# Altium PCB Electrode_Array_Hex_PCB.PcbDoc
Units mm, origin at the board's own origin, x right, y up, seen from the top; angles counter-clockwise.
Board outline 39.88 x 41.27 mm, 2 copper layers (Top Layer, Bottom Layer); 2 components, 43 nets, 90 pads, 62 vias.
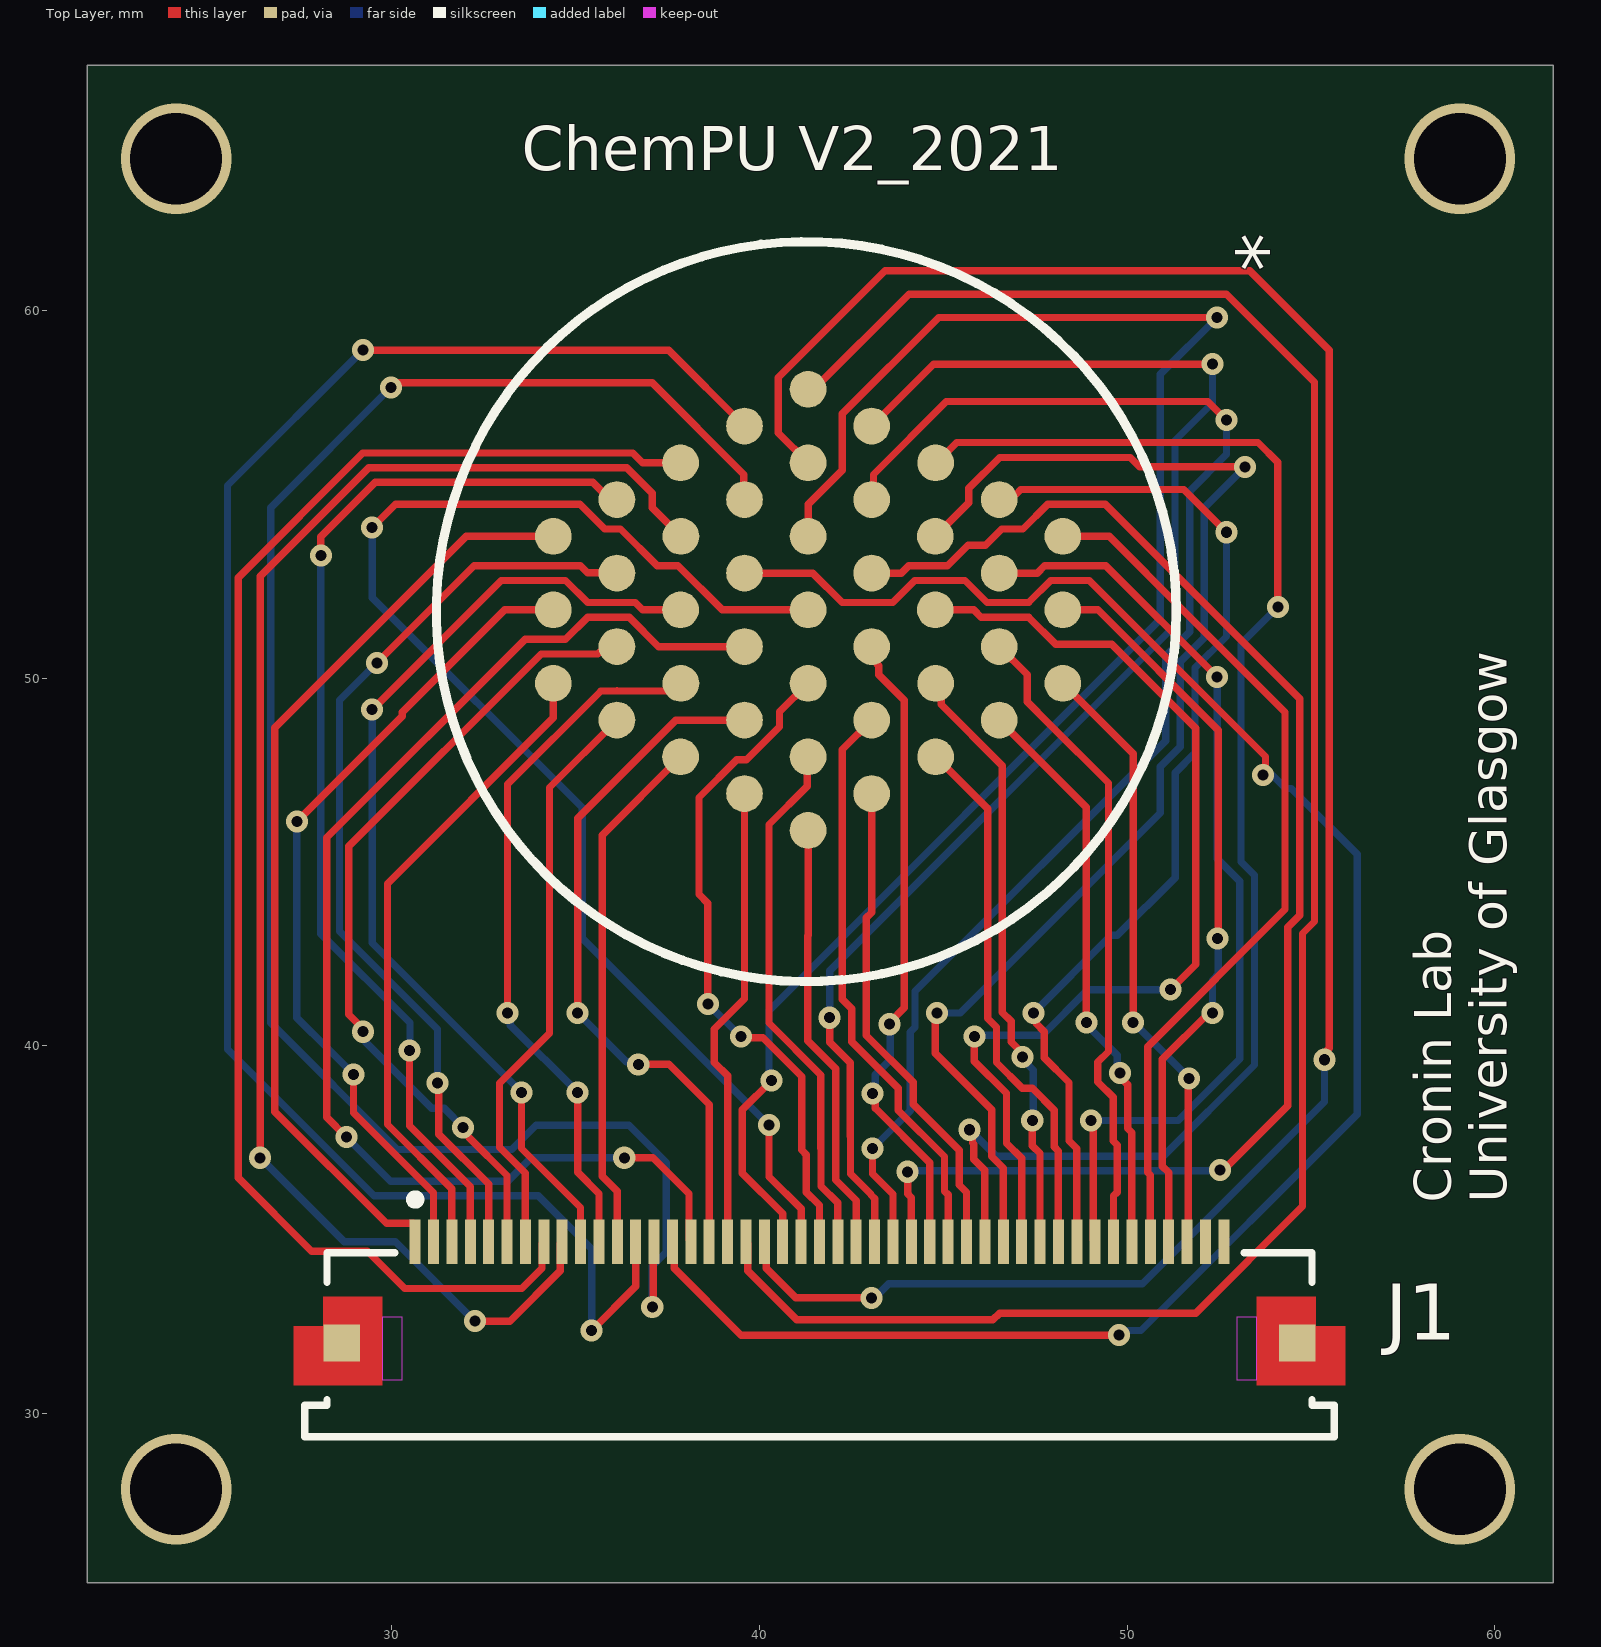
[diagram p0: Top Layer view]
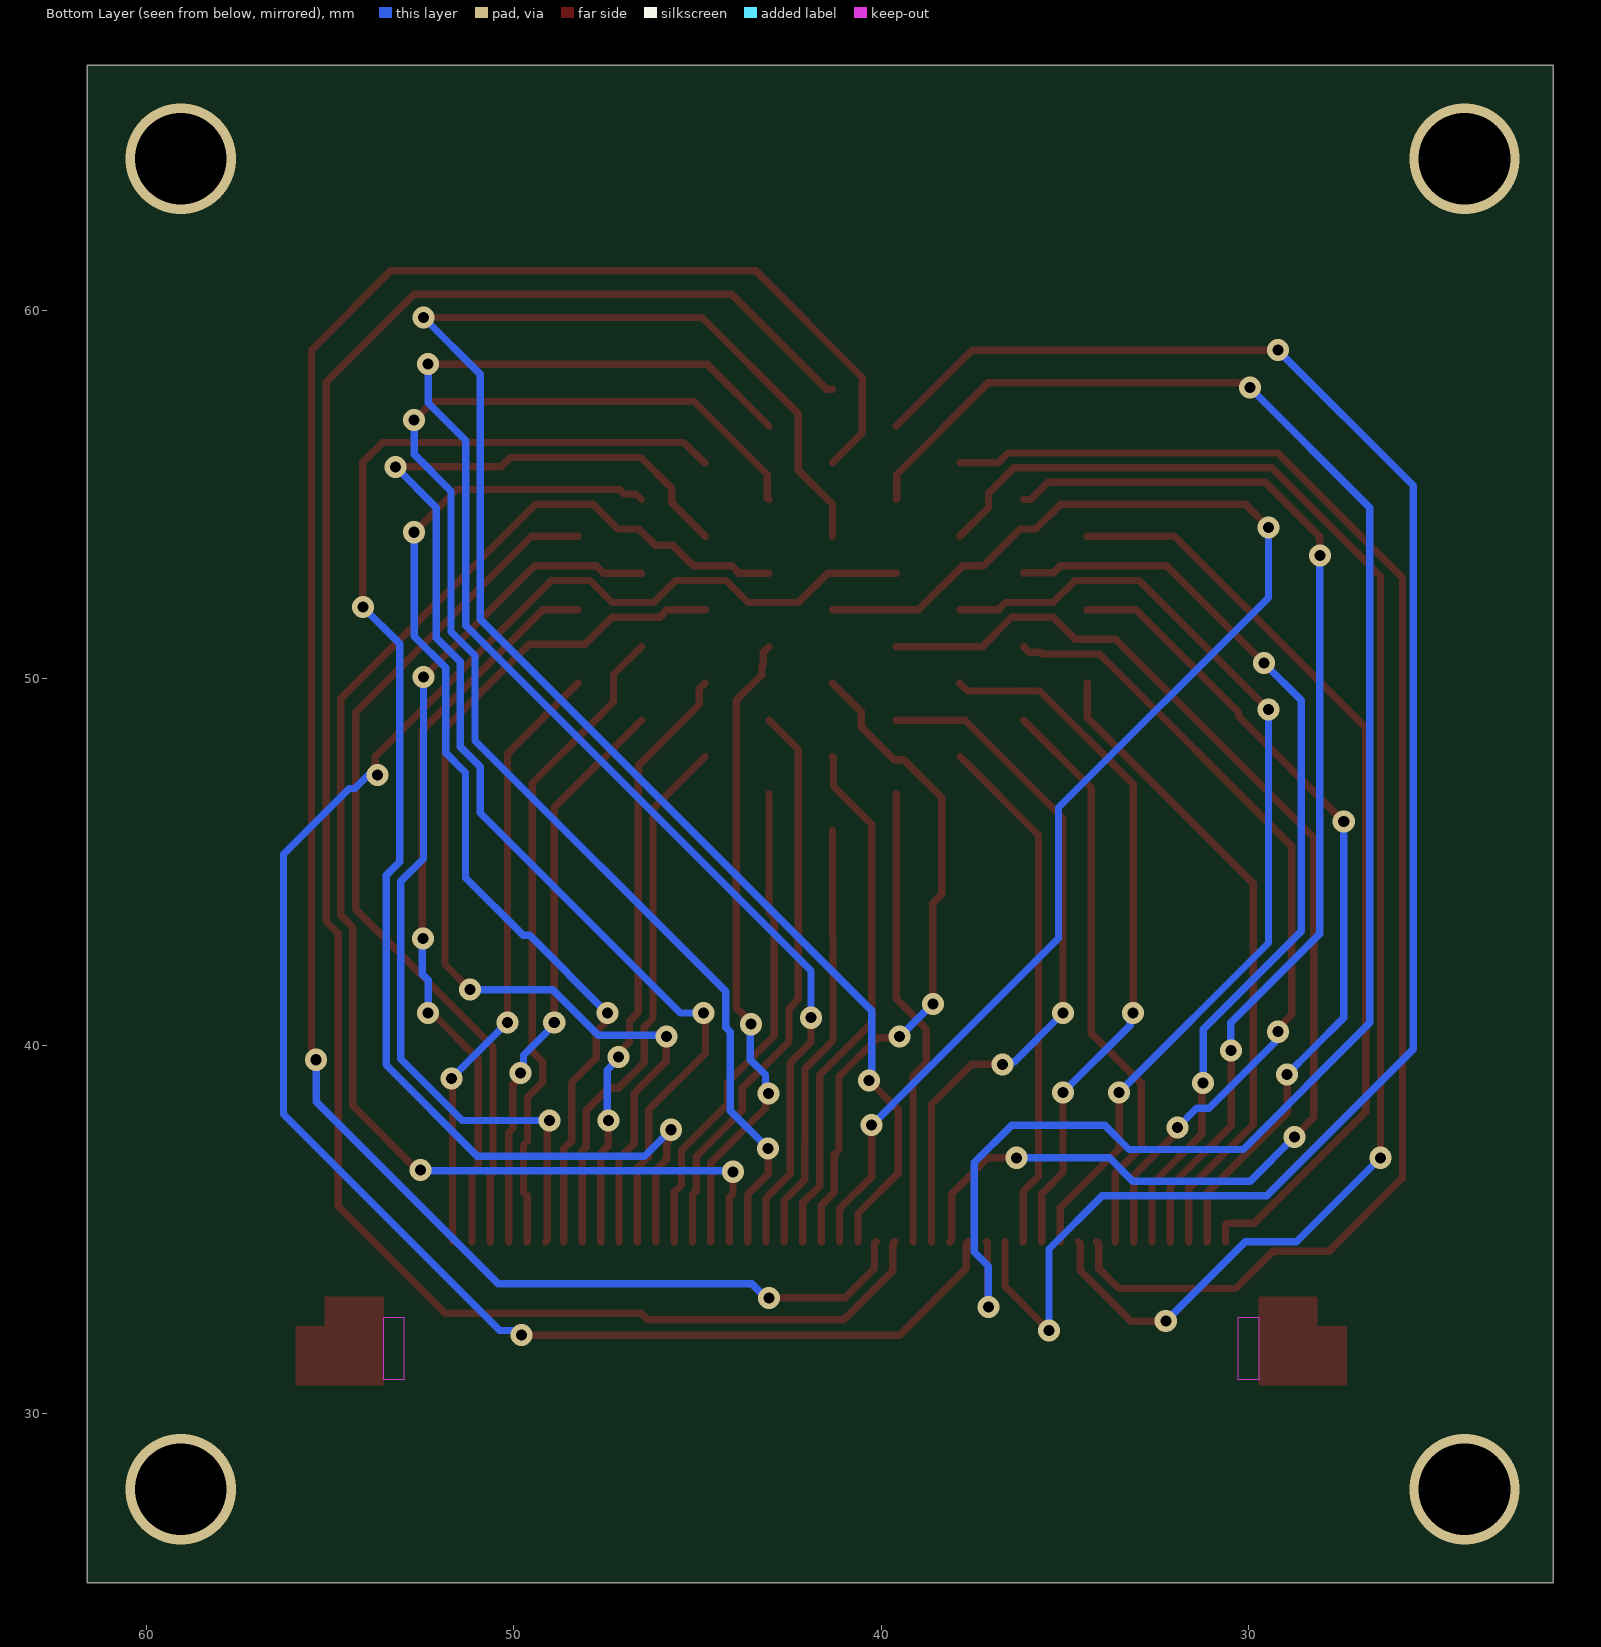
[diagram p1: Bottom Layer view, seen from below]

## Layer stack, top to bottom
Top Solder: solder mask 0.0102, Solder Resist, Dk 3.5
Top Layer: signal copper 0.0356
Dielectric 1: dielectric 0.32, FR-4, Dk 4.8
Bottom Layer: signal copper 0.0356
Bottom Solder: solder mask 0.0102, Solder Resist, Dk 3.5

## Board outline
21.717,25.4 61.595,25.4 61.595,66.675 21.717,66.675

## Design rules (kind name [scope] priority, off if disabled: settings)
Clearance [All] p1: gap=0.2 ignorepadtopadclearanceinfootprint=FALSE
PolygonConnect [All] p1: connectstyle=Relief reliefconductorwidth=0.254 reliefentries=4 polygonreliefangle="90 Angle" airgapwidth=0.254
RoutingVias [All] p1: holewidth=0.3 width=0.6 viastyle="Through Hole" minholewidth=0.3 minwidth=0.6 maxholewidth=0.3 maxwidth=0.6
SolderMaskExpansion [All] p1: expansion=0.102 istentingtop=FALSE
Width [All] p1: maxlimit=0.2 minlimit=0.15 preferedwidth=0.2
30 further rules are at their usual default settings.

## Components (designator, comment, footprint, x,y, rotation, side; value= is the part's Value field where it differs from the comment)
* "Electrode_Array_Hex" PCBComponent_1 1300.813,-1207.626 r270 top
J1 "54132-4562" MOLX-54132-4562 41.633,33.296 r0 top

## Footprints (in the part's own frame and the unit in brackets; to place one, negate y for a bottom-side part, rotate by r counter-clockwise, add the part's x,y. Pads: shape width x height; smd on the part's side, far side on the other; paste and mask are expansions set on the pad)
MOLX-54132-4562 [mm] "FPC Connector, 45-Leads, Right Angle, Pitch 0.5 mm, Mated Height 2.0 mm, SMT"
  rect 0.3x1.2 smd: 1(-11,1.375) 2(-10.5,1.375) 3(-10,1.375) 4(-9.5,1.375) 5(-9,1.375) 6(-8.5,1.375) 7(-8,1.375) 8(-7.5,1.375) 9(-7,1.375) 10(-6.5,1.375) 11(-6,1.375) 12(-5.5,1.375) 13(-5,1.375) 14(-4.5,1.375) 15(-4,1.375) 16(-3.5,1.375) 17(-3,1.375) 18(-2.5,1.375) 19(-2,1.375) 20(-1.5,1.375) 21(-1,1.375) 22(-0.5,1.375) 23(0,1.375) 24(0.5,1.375) 25(1,1.375) 26(1.5,1.375) 27(2,1.375) 28(2.5,1.375) 29(3,1.375) 30(3.5,1.375) 31(4,1.375) 32(4.5,1.375) 33(5,1.375) 34(5.5,1.375) 35(6,1.375) 36(6.5,1.375) 37(7,1.375) 38(7.5,1.375) 39(8,1.375) 40(8.5,1.375) 41(9,1.375) 42(9.5,1.375) 43(10,1.375) 44(10.5,1.375) 45(11,1.375)
  rect 1x1 smd: MP1(-13,-1.375) MP2(13,-1.375)
  Top Layer region: 11.9,-0.125 13.5,-0.125 13.5,-0.925 14.3,-0.925 14.3,-2.525 11.9,-2.525
  Top Layer region: -11.9,-0.125 -13.5,-0.125 -13.5,-0.925 -14.3,-0.925 -14.3,-2.525 -11.9,-2.525
  Keep-Out Layer region: 11.9,-0.675 11.35,-0.675 11.35,-2.375 11.9,-2.375
  Keep-Out Layer region: -11.9,-2.375 -11.35,-2.375 -11.35,-0.675 -11.9,-0.675
  silkscreen extent -14,-3.92 14,2.65, body extent -14,-3.92 14,1.68, height 2.01
PCBComponent_1 [mm]
  round 1 smd paste+0 mask+0: WE1(-1261.49,-1266.42) WE2(-1259.49,-1266.42) WE3(-1257.49,-1266.42) WE4(-1262.49,-1264.69) WE5(-1260.49,-1264.69) WE6(-1258.49,-1264.69) WE7(-1256.49,-1264.69) WE8(-1263.49,-1262.96) WE9(-1261.49,-1262.95) WE10(-1259.49,-1262.96) WE11(-1257.49,-1262.95) WE12(-1255.49,-1262.96) WE13(-1264.49,-1261.22) WE14(-1262.49,-1261.22) WE15(-1260.49,-1261.22) WE16(-1258.49,-1261.22) WE17(-1256.49,-1261.22) WE18(-1254.49,-1261.22) WE19(-1265.49,-1259.49) WE20(-1263.49,-1259.49) WE21(-1261.49,-1259.49) WE22(-1259.49,-1259.49) WE23(-1257.49,-1259.49) WE24(-1255.49,-1259.49) WE25(-1253.49,-1259.49) WE26(-1264.49,-1257.76) WE27(-1262.49,-1257.76) WE28(-1260.49,-1257.76) WE29(-1258.49,-1257.76) WE30(-1256.49,-1257.76) WE31(-1254.49,-1257.76) WE32(-1263.49,-1256.02) WE33(-1261.49,-1256.03) WE34(-1259.49,-1256.03) WE35(-1257.49,-1256.02) WE36(-1255.49,-1256.02) WE37(-1262.49,-1254.29) WE38(-1260.49,-1254.29) WE39(-1258.49,-1254.29) WE40(-1256.49,-1254.29) WE41(-1261.49,-1252.56) WE42(-1259.49,-1252.56) WE43(-1257.49,-1252.56)

## Part data
J1: library part CMP-1241-00535-1, "0.5 mm Pitch Easy-On(TM) Type FPC Connector, 2.0 mm Mated Height, Right Angle, ZIF, SMT, Bottom Contact, 45 Circuits, -20 to 85 degC, ELV and RoHS Compliant, Tape and Reel", Current (Max per Contact)=0.5A, Manufacturer=Molex, Voltage (Max)=50V, Circuits (Loaded)=45, ComponentLink1Description="Manufacturer URL", ComponentLink1URL=http://www.molex.com/molex/index.jsp, ComponentLink2Description=Datasheet, ComponentLink2URL=http://www.molex.com/webdocs/datasheets/pdf/en-us/0541324562_FFC_FPC_CONNECTORS.pdf, ComponentLink3Description="Package Specification", ComponentLink3URL=http://www.molex.com/pdm_docs/sd/541324562_sd.pdf, Contact Position=Bottom, Durability (mating cycles max)=20, Entry Angle="90degrees Angle", Mated Height=2.00mm, Material - Metal="Phosphor Bronze", Material - Plating Mating=Gold, Material - Plating Termination=Gold, Mounting Technology="Surface Mount", Number of Rows=1, Orientation="Right Angle", PackageDescription="45-Lead FPC Connector, Pitch 0.5 mm", PackageReference=54132-4562, PackageVersion="Rev. F, 07/2010", Packing="Tape and Reel", PartNumber=54132-4562, PCB Locator=No, PCB Retention=Yes, Pitch - Mating Interface=0.50mm, Polarized to PCB=Yes, RoHS=TRUE, Stackable=No

## Via types
v1: diameter 0.6, hole 0.3, Top Layer to Bottom Layer, 58 vias
v2: diameter 3, hole 2.5, Top Layer to Bottom Layer, 4 vias

## Nets (pads, with @x,y where several pads share a name; then routed paths per layer and width w, separated by ;. In a path a pad name is that pad's centre, name@x,y a point inside that pad or via, vN(x,y) a via of type N, cw(c..) or ccw(c..) an arc to the next point about the centre after c; other vN are vias at no path point)
WE1: *.WE1 J1.1 | length 25.7
  Top Layer w0.2: J1.1 30.633,35.121 30.583,35.171 29.853,35.171 26.816,38.208 26.816,48.66 32.02,53.864 *.WE1
WE2: *.WE2 J1.2 | length 22.4
  Top Layer w0.2: v1(27.416,46.101) 30.28,48.965 30.28,49.076 33.068,51.864 *.WE2 ; v1(28.956,39.227) 28.956,38.178 31.133,36.001 J1.2
  Bottom Layer w0.2: v1(27.416,46.101) 27.416,40.767 28.292,39.891 v1(28.956,39.227)
WE3: *.WE3 J1.3 | length 17.8
  Top Layer w0.2: J1.3 31.633,36.11 29.88,37.863 29.88,44.416 34.393,48.929 *.WE3
WE4: *.WE4 J1.4 | length 29.7
  Top Layer w0.2: v1(28.067,53.34) 28.067,53.848 29.552,55.333 35.46,55.333 35.929,54.864 *.WE4 ; v1(30.48,39.878) 30.48,37.829 32.133,36.176 J1.4
  Bottom Layer w0.2: v1(28.067,53.34) 28.067,43.053 30.493,40.627 30.493,39.891 v1(30.48,39.878)
WE5: *.WE5 J1.5 | length 25.6
  Top Layer w0.2: v1(29.591,50.419) 32.236,53.064 34.558,53.064 35.132,53.064 35.323,52.873 36.114,52.873 *.WE5 ; v1(31.242,38.989) 31.277,38.954 31.277,37.597 32.633,36.241 J1.5
  Bottom Layer w0.2: v1(29.591,50.419) 28.575,49.403 28.575,43.122 31.242,40.455 v1(31.242,38.989)
WE6: *.WE6 J1.6 | length 22.3
  Top Layer w0.2: v1(29.21,40.386) 29.21,40.473 28.829,40.854 28.829,45.431 34.062,50.664 34.724,50.664 35.606,50.664 35.653,50.711 35.97,50.711 *.WE6 ; v1(31.941,37.782) 31.941,37.674 32.107,37.508 32.107,37.501 33.133,36.475 J1.6
  Bottom Layer w0.2: v1(29.21,40.386) 29.287,40.309 29.287,40.096 31.083,38.3 31.423,38.3 v1(31.941,37.782)
WE7: *.WE7 J1.7 | length 15.8
  Top Layer w0.2: J1.7 33.633,36.54 32.928,37.245 32.928,38.984 34.111,40.167 34.29,40.346 34.29,47.031 *.WE7
WE8: *.WE8 J1.8 | length 40.4
  Top Layer w0.2: J1.8 34.083,34.621 34.083,33.947 33.537,33.401 30.353,33.401 29.337,34.417 27.813,34.417 25.816,36.414 25.816,52.74 29.209,56.133 36.551,56.133 36.82,55.864 *.WE8
WE9: *.WE9 J1.9 | length 40.9
  Top Layer w0.2: v1(26.416,36.957) 26.416,52.774 29.374,55.733 36.386,55.733 37.082,55.036 37.082,54.645 *.WE9 ; v1(32.258,32.512) 33.214,32.512 34.583,33.881 34.583,34.621 J1.9
  Bottom Layer w0.2: v1(26.416,36.957) 28.702,34.671 30.099,34.671 v1(32.258,32.512)
WE10: *.WE10 J1.10 | length 27
  Top Layer w0.2: v1(29.464,49.149) 32.979,52.664 34.724,52.664 35.324,52.064 36.62,52.064 36.82,51.864 *.WE10 ; v1(33.528,38.735) 33.528,37.211 35.133,35.606 J1.10
  Bottom Layer w0.2: v1(29.464,49.149) 29.464,42.799 v1(33.528,38.735)
WE11: *.WE11 J1.11 | length 19.3
  Top Layer w0.2: v1(33.147,40.894) 33.147,47.117 35.687,49.657 36.017,49.657 cw(c36.123,48.864) 36.229,49.657 37.656,49.657 *.WE11 ; v1(35.052,38.735) 35.052,36.559 35.633,35.978 J1.11
  Bottom Layer w0.2: v1(33.147,40.894) 33.224,40.817 33.224,40.563 v1(35.052,38.735)
WE12: *.WE12 J1.12 | length 14.2
  Top Layer w0.2: J1.12 36.133,36.043 35.722,36.454 35.722,45.733 *.WE12
WE13: *.WE13 J1.13 | length 49.1
  Top Layer w0.2: v1(29.21,58.928) 37.529,58.928 *.WE13 ; v1(35.433,32.258) 36.633,33.458 J1.13
  Bottom Layer w0.2: v1(29.21,58.928) 25.527,55.245 25.527,39.91 29.515,35.922 33.986,35.922 35.433,34.475 v1(35.433,32.258)
WE14: *.WE14 J1.14 | length 48.8
  Top Layer w0.2: v1(29.972,57.912) 30.099,58.039 37.084,58.039 39.576,55.547 39.576,54.881 *.WE14 ; v1(37.084,32.893) 37.109,32.918 37.109,34.646 J1.14
  Bottom Layer w0.2: v1(29.972,57.912) 26.705,54.645 26.705,40.629 30.152,37.183 33.258,37.183 33.921,37.846 36.449,37.846 37.465,36.83 37.465,34.392 37.084,34.011 v1(37.084,32.893)
WE15: *.WE15 J1.15 | length 50.9
  Top Layer w0.2: J1.15 37.683,34.621 37.683,33.947 39.499,32.131 v1(49.784,32.131) ; *.WE15 41.454,52.864 42.254,52.064 43.623,52.064 44.223,52.664 45.592,52.664 46.192,52.064 47.322,52.064 47.922,52.664 48.976,52.664 53.768,47.872 53.768,47.44 v1(53.699,47.371)
  Bottom Layer w0.2: v1(49.784,32.131) 49.911,32.258 50.379,32.258 56.261,38.14 56.261,45.212 54.468,47.005 54.32,47.005 53.953,47.371 v1(53.699,47.371)
WE16: *.WE16 J1.16 | length 34.4
  Top Layer w0.2: v1(28.761,37.524) 28.229,38.056 28.229,45.668 33.625,51.064 34.724,51.064 35.324,51.664 36.454,51.664 37.254,50.864 *.WE16 ; v1(36.322,36.957) 37.103,36.957 38.083,35.977 38.083,34.721 J1.16
  Bottom Layer w0.2: v1(28.761,37.524) 29.963,36.322 33.152,36.322 33.787,36.957 v1(36.322,36.957)
WE17: *.WE17 J1.17 | length 19.3
  Top Layer w0.2: v1(35.052,40.894) 35.052,46.194 37.722,48.864 *.WE17 ; v1(36.703,39.497) 37.54,39.497 38.633,38.404 J1.17
  Bottom Layer w0.2: v1(35.052,40.894) 36.372,39.574 36.626,39.574 v1(36.703,39.497)
WE18: *.WE18 J1.18 | length 12.7
  Top Layer w0.2: J1.18 39.133,39.186 38.77,39.549 38.77,40.461 39.593,41.284 *.WE18
WE19: *.WE19 J1.19 | length 56.1
  Top Layer w0.2: J1.19 39.683,34.621 39.683,33.881 41.017,32.547 46.35,32.547 46.534,32.731 51.867,32.731 54.772,35.636 54.772,43.059 55.099,43.386 55.099,58.058 52.705,60.452 44.069,60.452 41.481,57.864 *.WE19
WE20: *.WE20 J1.20 | length 58.7
  Top Layer w0.2: J1.20 40.183,34.621 40.183,33.947 40.983,33.147 v1(43.053,33.147) ; *.WE20 40.513,56.674 40.513,58.185 43.415,61.087 53.34,61.087 55.499,58.928 55.499,39.941 55.449,39.891 55.449,39.701 v1(55.372,39.624)
  Bottom Layer w0.2: v1(43.053,33.147) 43.14,33.147 43.521,33.528 50.419,33.528 55.372,38.481 v1(55.372,39.624)
WE21: *.WE21 J1.21 | length 46
  Top Layer w0.2: v1(40.331,39.061) 39.533,38.263 39.533,36.54 40.63,35.443 40.63,34.674 J1.21 ; *.WE21 41.323,54.733 42.253,55.663 42.253,57.195 44.875,59.817 v1(52.451,59.817)
  Bottom Layer w0.2: v1(40.331,39.061) 40.259,39.133 40.259,40.957 50.905,51.603 50.905,58.271 v1(52.451,59.817)
WE22: *.WE22 J1.22 | length 37.6
  Top Layer w0.2: v1(29.464,54.102) 30.099,54.737 35.119,54.737 35.792,54.064 36.219,54.064 37.219,53.064 37.784,53.064 38.984,51.864 *.WE22 ; v1(40.259,37.846) 40.259,36.445 41.133,35.571 J1.22
  Bottom Layer w0.2: v1(29.464,54.102) 29.464,52.197 35.176,46.485 35.176,42.929 39.081,39.024 v1(40.259,37.846)
WE23: *.WE23 J1.23 | length 18.3
  Top Layer w0.2: v1(38.596,41.136) 38.596,43.879 38.354,44.122 38.354,46.756 39.383,47.785 39.645,47.785 40.547,48.687 40.547,49.088 *.WE23 ; v1(39.497,40.259) 39.536,40.22 40.097,40.22 41.148,39.169 41.148,37.171 41.276,37.043 41.276,36.021 41.633,35.664 J1.23
  Bottom Layer w0.2: v1(38.596,41.136) 38.608,41.136 39.485,40.259 v1(39.497,40.259)
WE24: *.WE24 J1.24 | length 14.4
  Top Layer w0.2: *.WE24 41.298,47.839 41.298,47.064 40.259,46.025 40.259,40.624 41.672,39.211 41.672,37.212 41.676,37.208 41.676,36.187 42.133,35.73 J1.24
WE25: *.WE25 J1.25 | length 11.7
  Top Layer w0.2: *.WE25 41.323,43.013 41.31,43 41.31,40.138 42.072,39.376 42.072,37.378 42.076,37.374 42.076,36.352 42.633,35.795 J1.25
WE26: *.WE26 J1.26 | length 38.7
  Top Layer w0.2: v1(41.91,40.767) 41.91,40.104 42.472,39.542 42.472,37.544 42.476,37.54 42.476,36.518 43.033,35.961 43.033,35.944 43.133,35.844 J1.26 ; *.WE26 44.736,58.547 v1(52.324,58.547)
  Bottom Layer w0.2: v1(41.91,40.767) 41.91,42.043 51.305,51.438 51.305,56.472 52.324,57.491 v1(52.324,58.547)
WE27: *.WE27 J1.27 | length 37.9
  Top Layer w0.2: *.WE27 43.101,54.912 43.101,55.547 45.085,57.531 52.197,57.531 v1(52.705,57.023) ; v1(43.076,37.211) 43.076,36.52 43.633,35.963 J1.27
  Bottom Layer w0.2: v1(43.076,37.211) 44.104,38.239 44.104,40.381 44.231,40.508 44.231,41.483 51.051,48.303 51.051,50.618 51.705,51.272 51.705,55.094 52.705,56.094 v1(52.705,57.023)
WE28: *.WE28 J1.28 | length 38.9
  Top Layer w0.2: *.WE28 43.857,52.864 44.057,53.064 45.114,53.064 45.674,53.624 46.151,53.624 46.592,54.064 47.168,54.064 47.841,54.737 49.403,54.737 54.699,49.441 54.699,43.552 54.372,43.225 54.372,38.37 52.621,36.619 v1(52.535,36.619) ; v1(44.033,36.576) 44.033,35.976 44.133,35.876 J1.28
  Bottom Layer w0.2: v1(44.033,36.576) 44.057,36.6 52.515,36.6 v1(52.535,36.619)
WE29: *.WE29 J1.29 | length 17.6
  Top Layer w0.2: *.WE29 43.206,50.711 43.206,50.384 43.243,50.347 43.243,50.102 43.942,49.403 43.942,41.038 43.542,40.638 v1(43.542,40.59) ; v1(43.072,38.705) 43.149,38.629 43.149,38.309 44.633,36.825 J1.29
  Bottom Layer w0.2: v1(43.072,38.705) 43.149,38.782 43.149,39.213 43.561,39.626 43.561,40.571 v1(43.542,40.59)
WE30: *.WE30 J1.30 | length 15.7
  Top Layer w0.2: *.WE30 42.253,48.064 42.253,41.273 42.51,41.016 42.51,40.116 43.78,38.846 43.78,38.245 45.033,36.992 45.033,36.051 45.133,35.951 J1.30
WE31: *.WE31 J1.31 | length 13.4
  Top Layer w0.2: *.WE31 43.053,43.629 42.91,43.486 42.91,40.281 44.18,39.011 44.18,38.41 45.433,37.157 45.433,36.216 45.633,36.016 J1.31
WE32: *.WE32 J1.32 | length 39
  Top Layer w0.2: *.WE32 44.816,55.864 45.37,56.418 53.564,56.418 54.102,55.88 v1(54.102,51.943) ; v1(45.72,37.719) 45.797,37.642 45.797,37.36 45.833,37.323 45.833,36.913 46.133,36.613 J1.32
  Bottom Layer w0.2: v1(45.72,37.719) 46.439,37 50.987,37 53.467,39.48 53.467,44.645 53.099,45.013 53.099,50.94 v1(54.102,51.943)
WE33: *.WE33 J1.33 | length 35.4
  Top Layer w0.2: *.WE33 45.697,54.778 45.697,55.169 46.535,56.007 50.089,56.007 50.343,55.753 v1(53.213,55.753) ; v1(44.831,40.894) 44.781,40.844 44.781,39.801 46.32,38.262 46.32,36.992 46.633,36.679 J1.33
  Bottom Layer w0.2: v1(44.831,40.894) 45.466,40.894 50.908,46.336 50.908,47.594 51.451,48.137 51.451,50.452 52.105,51.106 52.105,54.645 v1(53.213,55.753)
WE34: *.WE34 J1.34 | length 27.8
  Top Layer w0.2: *.WE34 45.826,51.864 46.026,51.664 47.322,51.664 48.059,50.927 49.582,50.927 51.867,48.642 51.867,42.215 v1(51.181,41.529) ; v1(45.847,40.259) 45.847,39.583 46.72,38.71 46.72,37.354 47.133,36.941 J1.34
  Bottom Layer w0.2: v1(45.847,40.259) 45.881,40.293 47.699,40.293 48.935,41.529 v1(51.181,41.529)
WE35: *.WE35 J1.35 | length 16.4
  Top Layer w0.2: *.WE35 44.946,49.711 44.946,49.288 46.609,47.625 46.609,40.911 46.847,40.673 46.847,40.106 47.152,39.801 v1(47.152,39.693) ; v1(47.422,37.973) 47.422,37.287 47.633,37.076 J1.35
  Bottom Layer w0.2: v1(47.152,39.693) 47.152,39.642 47.451,39.344 47.451,38.002 v1(47.422,37.973)
WE36: *.WE36 J1.36 | length 14.7
  Top Layer w0.2: *.WE36 46.209,46.448 46.209,40.746 46.447,40.508 46.447,39.549 47.152,38.844 47.428,38.844 48.022,38.25 48.022,37.253 48.133,37.142 J1.36
WE37: *.WE37 J1.37 | length 28.8
  Top Layer w0.2: *.WE37 46.676,55.017 46.993,55.017 47.113,55.137 51.543,55.137 v1(52.705,53.975) ; v1(47.451,40.893) 47.527,40.816 47.527,40.611 47.752,40.386 47.752,39.676 48.422,39.006 48.422,37.418 48.633,37.207 J1.37
  Bottom Layer w0.2: v1(47.451,40.893) 49.565,43.008 49.739,43.008 51.308,44.577 51.308,47.429 51.851,47.972 51.851,50.287 52.705,51.141 v1(52.705,53.975)
WE38: *.WE38 J1.38 | length 26
  Top Layer w0.2: *.WE38 47.556,52.864 47.756,53.064 49.425,53.064 v1(52.451,50.038) ; v1(49.022,37.973) 49.083,37.912 49.083,34.721 J1.38
  Bottom Layer w0.2: v1(49.022,37.973) 51.395,37.973 53.067,39.645 53.067,44.48 52.451,45.096 v1(52.451,50.038)
WE39: *.WE39 J1.39 | length 17.8
  Top Layer w0.2: *.WE39 47.282,50.105 47.282,49.365 47.879,48.768 49.495,47.152 49.495,39.848 49.207,39.56 49.207,39.017 49.622,38.603 49.622,37.413 49.733,37.302 49.733,36.023 49.633,35.923 J1.39
WE40: *.WE40 J1.40 | length 15.7
  Top Layer w0.2: *.WE40 48.895,46.492 v1(48.895,40.64) ; v1(49.807,39.266) 49.807,39.158 50.022,38.943 50.022,37.754 50.133,37.643 J1.40
  Bottom Layer w0.2: v1(48.895,40.64) 48.895,40.582 49.73,39.747 49.73,39.343 v1(49.807,39.266)
WE41: *.WE41 J1.41 | length 24
  Top Layer w0.2: *.WE41 49.514,53.864 51.574,51.804 54.299,49.079 54.299,43.718 50.562,39.981 50.562,36.561 50.633,36.49 J1.41
WE42: *.WE42 J1.42 | length 20.3
  Top Layer w0.2: *.WE42 49.211,51.864 52.486,48.589 52.486,42.945 v1(52.467,42.926) ; J1.42 51.133,36.555 50.962,36.726 50.962,39.636 52.22,40.894 v1(52.324,40.894)
  Bottom Layer w0.2: v1(52.324,40.894) 52.324,41.791 52.486,41.953 52.486,42.907 v1(52.467,42.926)
WE43: *.WE43 J1.43 | length 16.6
  Top Layer w0.2: *.WE43 50.165,47.952 v1(50.165,40.64) ; J1.43 51.661,34.699 51.661,39.088 v1(51.689,39.116)
  Bottom Layer w0.2: v1(50.165,40.64) v1(51.689,39.116)
pads on no net: J1.44 J1.45 J1.MP1 J1.MP2
copper on no net:
  other v2: 24.13,27.94 59.055,27.94 24.13,64.135 59.055,64.135

## Silkscreen, mask and mechanical layers (free items; w line width, h text height)
Top Overlay:
  circle w0.254: c41.275,51.816 r10.066
  text "ChemPU V2_2021" at 33.528,63.827 h1.2
  text "Cronin Lab / University of Glasgow" at 60.325,35.729 h1 r90